# Altium PCB Sallen.PcbDoc
Units mm, origin at the board's own origin, x right, y up, seen from the top; angles counter-clockwise.
Board outline 100.27 x 50.25 mm, 2 copper layers (Top Layer, Bottom Layer); 68 components, 15 nets, 136 pads, 14 vias.
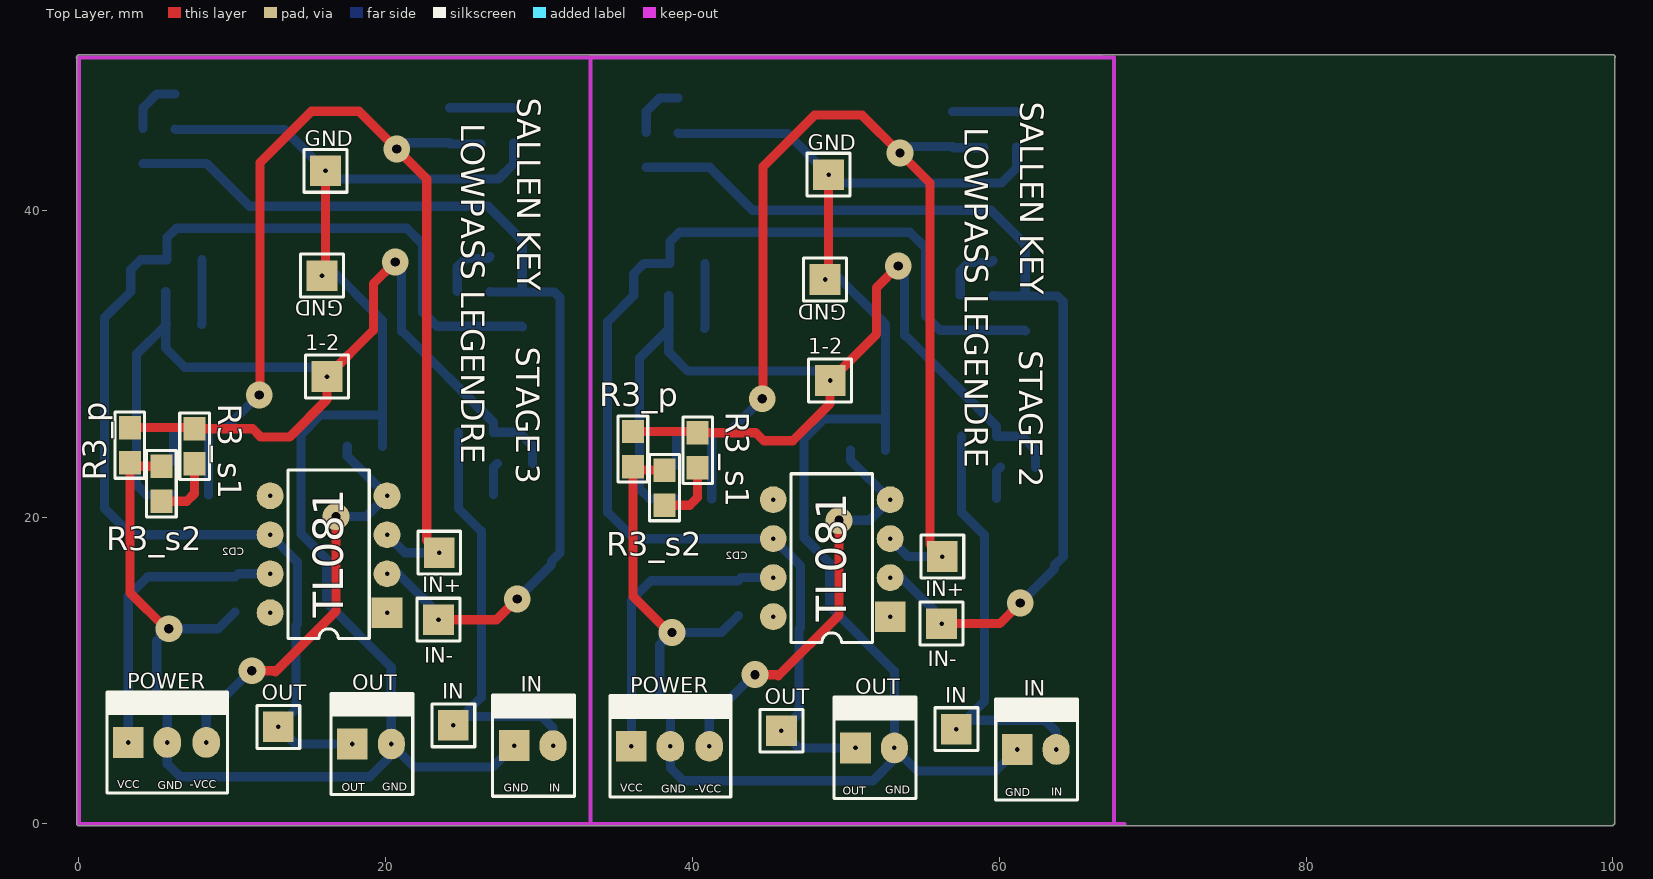
[diagram p0: Top Layer view]
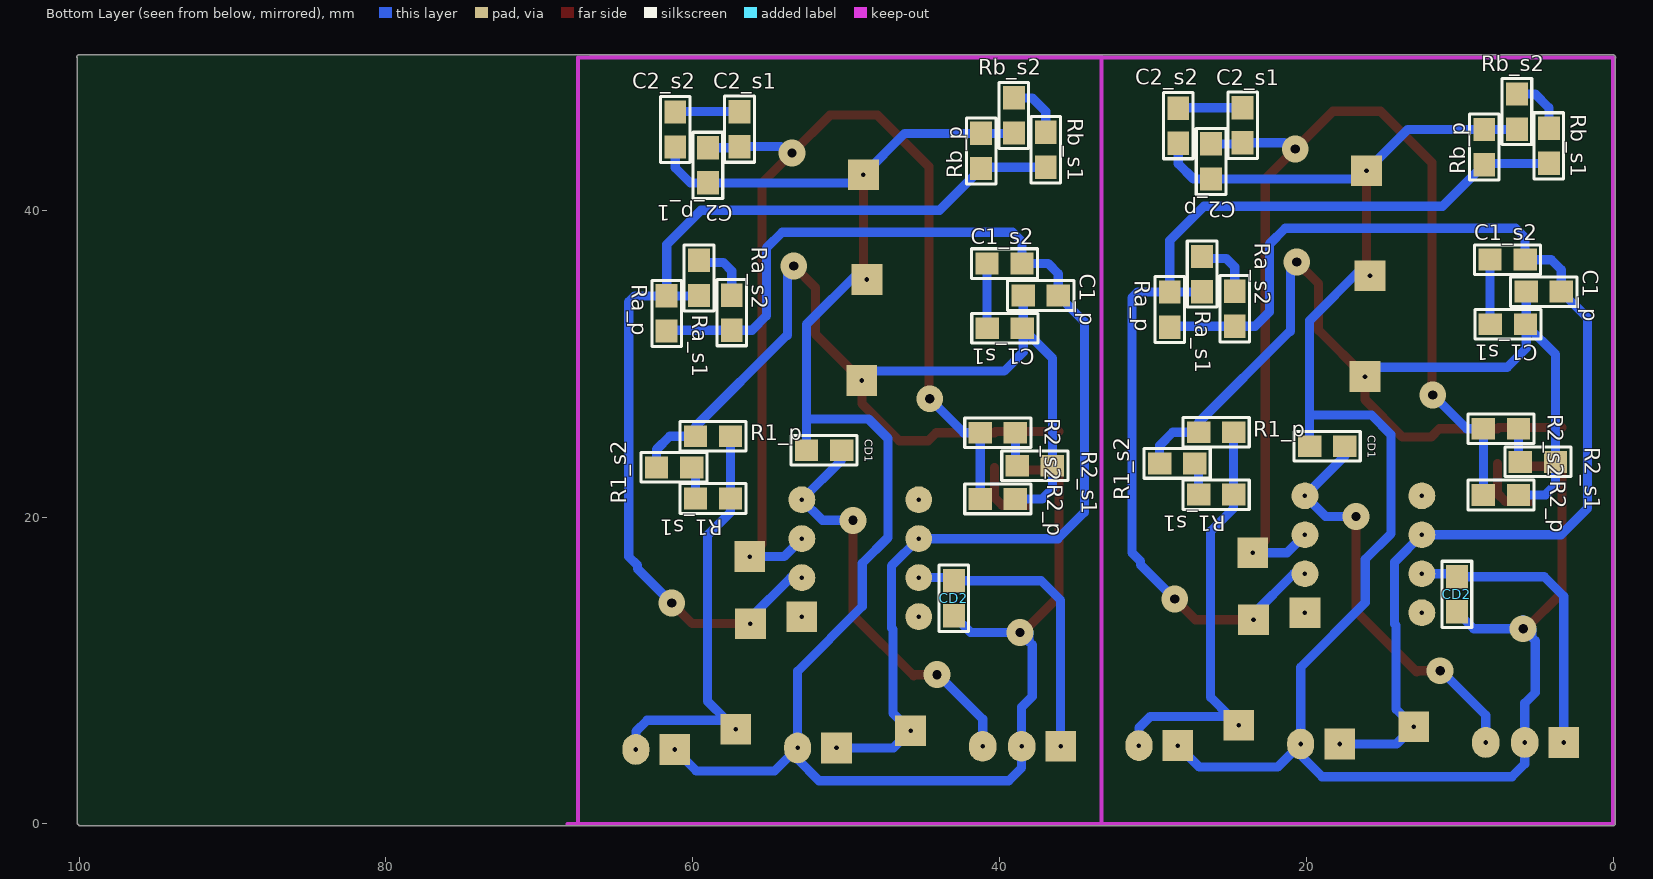
[diagram p1: Bottom Layer view, seen from below]

## Layer stack, top to bottom
Top Solder: solder mask 0.0102, Solder Resist, Dk 3.5
Top Layer: signal copper 0.0356
Dielectric 1: dielectric 0.32, FR-4, Dk 4.8
Bottom Layer: signal copper 0.0356
Bottom Solder: solder mask 0.0102, Solder Resist, Dk 3.5

## Board outline
-0.127,0 -0.127,49.911 cw(c0,49.911) -0.119,49.956 -0.119,49.955 cw(c0,50) 0,50.127 100.012,50.127 cw(c100.012,50) 100.14,50 cw(c100.012,50) 100.127,49.945 100.127,0.076 cw(c100,0.076) 100.044,-0.044 cw(c99.924,0) 99.924,-0.127 0,-0.127 cw(c0,0)

## Design rules (kind name [scope] priority, off if disabled: settings)
Clearance [All] p1: gap=0.6 ignorepadtopadclearanceinfootprint=FALSE
PolygonConnect [All] p1: connectstyle=Relief reliefconductorwidth=0.254 reliefentries=4 polygonreliefangle="90 Angle" airgapwidth=0.254
RoutingVias [All] p1: holewidth=0.7 width=2.5 viastyle="Through Hole" minholewidth=0.7 minwidth=2.5 maxholewidth=0.7 maxwidth=2.5
SolderMaskExpansion [All] p1: expansion=0.102
Width [All] p1: maxlimit=0.6 minlimit=0.6 preferedwidth=0.6
30 further rules are at their usual default settings.

## Classes and differential pairs
component class Sallen: POWER1

## Components (designator, comment, footprint, x,y, rotation, side; value= is the part's Value field where it differs from the comment)
1-2 "1-2" TPTH 16.18,29.159 r0 top (schematic designator TP9)
1-2 "1-2" TPTH 48.971,28.905 r0 top (schematic designator TP9)
C1_p "CAP" 0805 4.521,34.696 r180 bottom
C1_p "CAP" 0805 37.313,34.442 r180 bottom
C1_s1 "CAP" 0805 6.858,32.563 r0 bottom
C1_s1 "CAP" 0805 39.649,32.309 r0 bottom
C1_s2 "CAP" 0805 6.883,36.779 r180 bottom
C1_s2 "CAP" 0805 39.675,36.525 r180 bottom
C2_p "CAP" 0805 26.213,43.18 r270 bottom
C2_p_1 "CAP" 0805 59.004,42.926 r270 bottom (schematic designator C2_p)
C2_s1 "CAP" 0805 24.155,45.542 r90 bottom
C2_s1 "CAP" 0805 56.947,45.288 r90 bottom
C2_s2 "CAP" 0805 28.346,45.517 r270 bottom
C2_s2 "CAP" 0805 61.138,45.263 r270 bottom
CD1 "CAP" 0805 18.644,24.613 r0 bottom
CD1 "CAP" 0805 51.435,24.359 r0 bottom
CD2 "CAP" 0805 10.185,14.961 r270 bottom
CD2 "CAP" 0805 42.977,14.707 r270 bottom
GND "TP" TPTH 15.85,35.738 r90 top (schematic designator TP3)
GND "TP" TPTH 16.078,42.57 r90 top (schematic designator TP2)
GND "TP" TPTH 48.87,42.316 r90 top (schematic designator TP2)
GND "TP" TPTH 48.641,35.484 r90 top (schematic designator TP3)
IN "IN" TPTH 24.409,6.426 r0 top (schematic designator TP4)
IN "IN" MOLEX2 28.372,5.105 r0 top (schematic designator J3)
IN "IN" MOLEX2 61.163,4.851 r0 top (schematic designator J3)
IN "IN" TPTH 57.201,6.172 r0 top (schematic designator TP4)
IN+ "IN+" TPTH 23.495,17.678 r0 top (schematic designator TP7)
IN+ "IN+" TPTH 56.286,17.424 r0 top (schematic designator TP7)
IN- "IN-" TPTH 23.444,13.31 r0 top (schematic designator TP6)
IN- "IN-" TPTH 56.236,13.056 r0 top (schematic designator TP6)
OUT "OUT" TPTH 13.005,6.325 r0 top (schematic designator TP5)
OUT "OUT" MOLEX2 17.831,5.207 r0 top (schematic designator J4)
OUT "OUT" MOLEX2 50.622,4.953 r0 top (schematic designator J4)
OUT "OUT" TPTH 45.796,6.071 r0 top (schematic designator TP5)
POWER "SUPPLY" MOLEX3 3.226,5.309 r0 top (schematic designator J2)
POWER "SUPPLY" MOLEX3 36.017,5.055 r0 top (schematic designator J2)
R1_p "270" 0805 25.883,25.527 r180 bottom
R1_p "270" 0805 58.674,25.273 r180 bottom
R1_s1 "270" 0805 25.883,21.463 r180 bottom
R1_s1 "270" 0805 58.674,21.209 r180 bottom
R1_s2 "270" 0805 28.423,23.495 r0 bottom
R1_s2 "270" 0805 61.214,23.241 r0 bottom
R2_p "270" 0805 7.315,21.438 r180 bottom
R2_p "270" 0805 40.107,21.184 r180 bottom
R2_s1 "270" 0805 4.902,23.597 r180 bottom
R2_s1 "270" 0805 37.694,23.343 r180 bottom
R2_s2 "270" 0805 7.315,25.756 r0 bottom
R2_s2 "270" 0805 40.107,25.502 r0 bottom
R3_p "270" 0805 3.327,24.689 r90 top
R3_p "270" 0805 36.119,24.435 r90 top
R3_s1 "270" 0805 7.544,24.613 r90 top
R3_s1 "270" 0805 40.335,24.359 r90 top
R3_s2 "270" 0805 5.385,22.174 r270 top
R3_s2 "270" 0805 38.176,21.92 r270 top
Ra_p "270" 0805 28.905,33.528 r90 bottom
Ra_p "270" 0805 61.697,33.274 r90 bottom
Ra_s1 "270" 0805 26.797,35.839 r270 bottom
Ra_s1 "270" 0805 59.588,35.585 r270 bottom
Ra_s2 "270" 0805 24.663,33.579 r270 bottom
Ra_s2 "270" 0805 57.455,33.325 r270 bottom
Rb_p "270" 0805 8.407,44.12 r270 bottom
Rb_p "270" 0805 41.199,43.866 r270 bottom
Rb_s1 "270" 0805 4.191,44.196 r270 bottom
Rb_s1 "270" 0805 36.982,43.942 r270 bottom
Rb_s2 "270" 0805 6.274,46.431 r90 bottom
Rb_s2 "270" 0805 39.065,46.177 r90 bottom
TL081 "TL081" P008 16.281,17.577 r90 top (schematic designator U1)
TL081 "TL081" P008 49.073,17.323 r90 top (schematic designator U1)

## Footprints (in the part's own frame and the unit in brackets; to place one, negate y for a bottom-side part, rotate by r counter-clockwise, add the part's x,y. Pads: shape width x height; smd on the part's side, far side on the other; paste and mask are expansions set on the pad)
0805 [mil] "Pasivo 0805"
  rect 60x56 smd: 1(-45,0) 2(45,0)
  silkscreen extent -85,-38 85,38, body extent -40,-24 39,25, height 15
MOLEX2 [mm]
  rect 2x2 hole 0.3: 1(0,0)
  oval 1.75x2 hole 0.3: 2(2.54,0)
  silkscreen extent -1.4,-3.3 3.94,3.3, body extent -1.27,-3.17 3.81,3.17, height 10.74
MOLEX3 [mm] "Bornera con Tornillos 5mm separación"
  rect 2x2 hole 0.3: 1(0,0)
  oval 1.8x2 hole 0.3: 2(2.54,0) 3(5.08,0)
  silkscreen extent -1.4,-3.3 6.48,3.3, body extent -1.27,-3.17 6.35,3.17, height 10.74
P008 [mm] "DIP; 8 Leads; Row Spacing 7.62 mm; Pitch 2.54 mm"
  rect 2x2 hole 0.3: 1(-3.81,-3.81)
  round 1.75 hole 0.3: 2(-1.27,-3.81) 3(1.27,-3.81) 4(3.81,-3.81) 5(3.81,3.81) 6(1.27,3.81) 7(-1.27,3.81) 8(-3.81,3.81)
  silkscreen extent -5.5,-2.65 5.5,2.65
TPTH [mm]
  rect 2x2 hole 0.3: 1(0,0)
  silkscreen extent -1.4,-1.4 1.4,1.4, body extent -1.27,-1.27 1.27,1.27, height 6.04

## Part data
1-2 1-2 IN IN IN+ IN+ IN- IN- OUT OUT: library part TP
IN IN OUT OUT: library part MOLEX2
POWER POWER: library part MOLEX3
R1_p R1_p R1_s1 R1_s1 R1_s2 R1_s2 R2_p R2_p R2_s1 R2_s1 R2_s2 R2_s2 R3_p R3_p R3_s1 R3_s1 R3_s2 R3_s2 Ra_p Ra_p Ra_s1 Ra_s1 Ra_s2 Ra_s2 Rb_p Rb_p Rb_s1 Rb_s1 Rb_s2 Rb_s2: library part RES
TL081 TL081: library part TL081P, "JFET-Input Operational Amplifier", Code_JEDEC=MO-001-AN, ComponentLink1Description="Manufacturer Link", ComponentLink1URL=http://www.ti.com/, ComponentLink2Description=Datasheet, ComponentLink2URL=http://www-s.ti.com/sc/ds/tl081.pdf, DatasheetVersion=Feb-1999, LatestRevisionDate=04-Mar-2005, LatestRevisionNote="Stylized 3D Model Added.", Note="Pin 8 is not connected", PackageDescription="DIP; 8 Leads; Row Spacing 7.62 mm; Pitch 2.54 mm", PackageReference=P008, PackageVersion=Jun-1999, Published=16-Jan-2001, Publisher="Altium Limited"

## Via types
v1: diameter 1.75, hole 0.6, Top Layer to Bottom Layer, 14 vias

## Nets (pads, with @x,y where several pads share a name; then routed paths per layer and width w, separated by ;. In a path a pad name is that pad's centre, name@x,y a point inside that pad or via, vN(x,y) a via of type N, cw(c..) or ccw(c..) an arc to the next point about the centre after c; other vN are vias at no path point)
-VCC: CD1.1@17.501,24.613 POWER.3@8.306,5.309 TL081.4@20.091,21.387 | length 27.5
  Top Layer w0.6: v1(11.278,9.982) 12.725,9.982 12.802,9.906 16.764,13.868 v1(16.764,20.041)
  Bottom Layer w0.6: POWER.3@8.306,5.309 8.306,7.087 11.201,9.982 v1(11.278,9.982) ; v1(16.764,20.041) 18.745,20.041 20.091,21.387 17.501,23.978 CD1.1@17.501,24.613
GND: C2_p.2 C2_s2.2@28.346,44.374 CD1.2@19.787,24.613 CD2.2@10.185,13.818 GND.1@15.85,35.738 GND.1@16.078,42.57 IN.1@28.372,5.105 OUT.2@20.371,5.207 POWER.2@5.766,5.309 R3_p.1@3.327,23.546 R3_s2.1@5.385,23.317 Rb_p.1@8.407,45.263 Rb_s2.1@6.274,45.288 | length 128.3
  Top Layer w0.6: R3_s2.1@5.385,23.317 3.556,23.317 3.327,23.546 3.327,15.088 5.69,12.725 v1(5.867,12.725) ; GND.1@16.078,36.525 GND.1@16.078,42.57
  Bottom Layer w0.6: Rb_s2.1@6.274,45.288 6.299,45.263 8.407,45.263 13.386,45.263 16.078,42.57 16.612,42.037 C2_p.2 27.356,42.037 28.346,43.028 C2_s2.2@28.346,44.374 ; CD2.2@10.185,13.818 9.093,12.725 v1(5.867,12.725) ; GND.1@16.358,36.246 19.787,32.817 19.787,26.645 ; CD1.2@19.787,24.613 19.787,26.645 ; IN.1@28.372,5.105 26.975,3.708 21.869,3.708 OUT.2@20.371,5.207 ; v1@5.283,12.725 5.867,13.31 v1(5.867,12.725) ; v1@5.283,12.725 5.283,12.141 5.08,11.938 5.08,8.56 5.766,7.874 5.766,5.309 5.766,3.912 6.604,3.073 18.97,3.073 20.371,4.474 OUT.2@20.371,5.207 ; v1@5.283,12.725 v1(5.867,12.725) ; 19.787,26.645 15.748,26.645 14.478,25.375 14.478,18.923 16.154,17.247 16.154,14.431 20.371,10.215 OUT.2@20.371,5.207
NetC1_p_1: 1-2.1@16.18,29.159 C1_p.1@5.664,34.696 C1_s1.1@5.715,32.563 R1_p.1@27.026,25.527 R1_s2.2@29.566,23.495 R2_p.2@6.172,21.438 R2_s1.2@3.759,23.597 R3_p.2@3.327,25.832 R3_s1.2@7.544,25.756 | length 71.7
  Top Layer w0.6: R3_p.2@3.327,25.832 7.468,25.832 7.544,25.756 11.328,25.756 11.862,25.222 13.741,25.222 16.18,27.661 16.18,29.159 19.202,32.182 19.202,35.204 v1(20.625,36.627)
  Bottom Layer w0.6: C1_p.1@5.664,34.696 C1_s1.1@5.664,32.512 ; C1_s1.1@5.715,32.563 C1_s1.1@5.664,32.512 ; R2_p.2@6.172,21.438 4.42,21.438 3.759,22.098 3.759,23.597 3.759,30.607 C1_s1.1@5.664,32.512 ; 1-2.1@16.18,29.159 15.57,29.769 6.909,29.769 5.664,31.013 C1_s1.1@5.664,32.512 ; v1(20.625,36.627) 21.031,36.22 21.031,32.106 21.082,32.106 27.026,26.162 27.026,25.527 28.702,25.527 29.566,24.663 R1_s2.2@29.566,23.495
NetC1_p_2: C1_p.2@3.378,34.696 C1_s2.2@5.74,36.779 OUT.1@13.005,6.325 OUT.1@17.831,5.207 Ra_p.1@28.905,32.385 Ra_s2.2@24.663,32.436 TL081.6@12.471,18.847 | length 79.7
  Bottom Layer w0.6: OUT.1@17.729,5.105 17.831,5.207 14.122,5.207 13.005,6.325 14.148,7.468 14.148,12.933 14.246,13.032 14.246,17.072 12.471,18.847 3.404,18.847 1.676,20.574 1.676,32.995 3.378,34.696 3.378,36.119 4.039,36.779 5.74,36.779 5.74,38.202 6.363,38.824 21.374,38.824 22.403,37.795 22.403,33.376 23.343,32.436 24.663,32.436 28.854,32.436 Ra_p.1@28.905,32.385
NetC1_s1_2: C1_s1.2@8.001,32.563 C1_s2.1@8.026,36.779 | length 4.2
  Bottom Layer w0.6: C1_s1.2@8.001,32.563 8.026,32.588 C1_s2.1@8.026,36.779
NetC2_p_1: C2_p.1 C2_s1.1@24.155,44.399 IN+.1@23.495,17.678 R2_p.1@8.458,21.438 R2_s2.2@8.458,25.756 TL081.3@20.091,18.847 | length 71.5
  Top Layer w0.6: v1@11.811,28.143 11.811,43.104 15.164,46.457 18.263,46.457 v1(20.726,43.993) 22.682,42.037 22.682,18.491 IN+.1@23.495,17.678
  Bottom Layer w0.6: R2_p.1@8.458,21.438 8.458,25.756 9.55,25.756 v1(11.76,27.965) ; TL081.3@20.091,18.847 21.26,17.678 IN+.1@23.495,17.678 ; v1@21.107,44.044 21.463,44.399 24.155,44.399 24.232,44.323 C2_p.1
NetC2_s1_2: C2_s1.2@24.155,46.685 C2_s2.1@28.346,46.66 | length 4.2
  Bottom Layer w0.6: C2_s1.2@24.155,46.685 28.321,46.685 C2_s2.1@28.346,46.66
NetJ3_2: IN.1@24.409,6.426 IN.2@30.912,5.105 R1_p.2@24.74,25.527 R1_s1.2@24.74,21.463 | length 27.9
  Bottom Layer w0.6: IN.1@24.409,6.426 IN.1@24.989,7.005 ; R1_p.2@24.74,25.527 24.74,21.463 24.74,20.574 26.238,19.075 26.238,8.255 IN.1@24.989,7.005 ; IN.2@30.912,5.105 30.912,6.274 30.18,7.005 IN.1@24.989,7.005
NetR1_s1_1: R1_s1.1@27.026,21.463 R1_s2.1@27.28,23.495 | length 2.1
  Bottom Layer w0.6: R1_s1.1@27.026,21.463 27.026,23.241 R1_s2.1@27.28,23.495
NetR2_s1_1: R2_s1.1@6.045,23.597 R2_s2.1@6.172,25.756 | length 2.2
  Bottom Layer w0.6: R2_s1.1@6.045,23.597 6.172,23.724 R2_s2.1@6.172,25.756
NetR3_s1_1: R3_s1.1@7.544,23.47 R3_s2.2@5.385,21.031 | length 4.3
  Top Layer w0.6: R3_s2.2@5.385,21.031 7.036,21.031 7.544,21.539 R3_s1.1@7.544,23.47
NetRa_p_2: IN-.1@23.444,13.31 Ra_p.2@28.905,34.671 Ra_s1.2@26.797,34.696 Rb_p.2@8.407,42.977 Rb_s1.2@4.191,43.053 TL081.2@20.091,16.307 | length 66.2
  Top Layer w0.6: IN-.1@23.444,13.31 27.229,13.31 v1(28.575,14.656)
  Bottom Layer w0.6: Rb_s1.2@4.191,43.053 8.331,43.053 8.407,42.977 11.125,40.259 26.67,40.259 28.905,38.024 Ra_p.2@28.905,34.671 ; TL081.2@20.091,16.307 20.824,16.307 23.444,13.687 IN-.1@23.444,13.31 ; Ra_s1.2@26.797,34.696 26.822,34.671 Ra_p.2@28.905,34.671 ; v1(28.575,14.656) 30.81,16.891 30.81,17.12 31.369,17.678 31.369,34.29 30.988,34.671 Ra_p.2@28.905,34.671
NetRa_s1_1: Ra_s1.1@26.797,36.982 Ra_s2.1@24.663,34.722 | length 4
  Bottom Layer w0.6: Ra_s2.1@24.663,34.722 24.663,36.297 25.222,36.855 26.67,36.855 Ra_s1.1@26.797,36.982
NetRb_s1_1: Rb_s1.1@4.191,45.339 Rb_s2.2@6.274,47.574 | length 3.8
  Bottom Layer w0.6: Rb_s1.1@4.191,45.339 4.191,46.685 5.08,47.574 Rb_s2.2@6.274,47.574
VCC: CD2.1@10.185,16.104 POWER.1@3.226,5.309 TL081.7@12.471,16.307 | length 19.4
  Bottom Layer w0.6: POWER.1@3.226,5.309 3.226,14.834 4.496,16.104 10.185,16.104 10.389,16.307 TL081.7@12.471,16.307
pads on no net: 1-2.1@48.971,28.905 C1_p.1@38.456,34.442 C1_p.2@36.17,34.442 C1_s1.1@38.506,32.309 C1_s1.2@40.792,32.309 C1_s2.1@40.818,36.525 C1_s2.2@38.532,36.525 C2_p_1.1 C2_p_1.2 C2_s1.1@56.947,44.145 C2_s1.2@56.947,46.431 C2_s2.1@61.138,46.406 C2_s2.2@61.138,44.12 CD1.1@50.292,24.359 CD1.2@52.578,24.359 CD2.1@42.977,15.85 CD2.2@42.977,13.564 GND.1@48.87,42.316 GND.1@48.641,35.484 IN+.1@56.286,17.424 IN-.1@56.236,13.056 IN.1@57.201,6.172 IN.1@61.163,4.851 IN.2@63.703,4.851 OUT.1@45.796,6.071 OUT.1@50.622,4.953 OUT.2@53.162,4.953 POWER.1@36.017,5.055 POWER.2@38.557,5.055 POWER.3@41.097,5.055 R1_p.1@59.817,25.273 R1_p.2@57.531,25.273 R1_s1.1@59.817,21.209 R1_s1.2@57.531,21.209 R1_s2.1@60.071,23.241 R1_s2.2@62.357,23.241 R2_p.1@41.25,21.184 R2_p.2@38.964,21.184 R2_s1.1@38.837,23.343 R2_s1.2@36.551,23.343 R2_s2.1@38.964,25.502 R2_s2.2@41.25,25.502 R3_p.1@36.119,23.292 R3_p.2@36.119,25.578 R3_s1.1@40.335,23.216 R3_s1.2@40.335,25.502 R3_s2.1@38.176,23.063 R3_s2.2@38.176,20.777 Ra_p.1@61.697,32.131 Ra_p.2@61.697,34.417 Ra_s1.1@59.588,36.728 Ra_s1.2@59.588,34.442 Ra_s2.1@57.455,34.468 Ra_s2.2@57.455,32.182 Rb_p.1@41.199,45.009 Rb_p.2@41.199,42.723 Rb_s1.1@36.982,45.085 Rb_s1.2@36.982,42.799 Rb_s2.1@39.065,45.034 Rb_s2.2@39.065,47.32 TL081.1 TL081.2@52.883,16.053 TL081.3@52.883,18.593 TL081.4@52.883,21.133 TL081.5 TL081.6@45.263,18.593 TL081.7@45.263,16.053 TL081.8
copper on no net: | length 516.9
  Top Layer w0.6: 36.119,25.578 40.259,25.578 40.335,25.502 44.12,25.502 44.653,24.968 46.533,24.968 48.971,27.407 48.971,28.905 51.994,31.928 51.994,34.95 v1(53.416,36.373) ; 38.176,20.777 39.827,20.777 40.335,21.285 40.335,23.216 ; 38.176,23.063 36.347,23.063 36.119,23.292 36.119,14.834 38.481,12.471 v1(38.659,12.471) ; v1(44.069,9.728) 45.517,9.728 45.593,9.652 49.555,13.614 v1(49.555,19.787) ; v1@44.602,27.889 44.602,42.85 47.955,46.203 51.054,46.203 v1(53.518,43.739) 55.474,41.783 55.474,18.237 56.286,17.424 ; 48.87,36.271 48.87,42.316 ; 56.236,13.056 60.02,13.056 v1(61.366,14.402)
  Bottom Layer w0.6: 36.017,5.055 36.017,14.58 37.287,15.85 42.977,15.85 43.18,16.053 45.263,16.053 ; 36.982,42.799 41.123,42.799 41.199,42.723 43.917,40.005 59.461,40.005 61.697,37.77 61.697,34.417 ; 36.982,45.085 36.982,46.431 37.871,47.32 39.065,47.32 ; 38.456,34.442 38.456,32.258 ; 38.506,32.309 38.456,32.258 ; 38.837,23.343 38.964,23.47 38.964,25.502 ; 38.964,21.184 37.211,21.184 36.551,21.844 36.551,23.343 36.551,30.353 38.456,32.258 ; 39.065,45.034 39.091,45.009 41.199,45.009 46.177,45.009 48.87,42.316 49.403,41.783 59.004,41.783 60.147,41.783 61.138,42.774 61.138,44.12 ; 40.792,32.309 40.818,32.334 40.818,36.525 ; 41.097,5.055 41.097,6.833 43.993,9.728 v1(44.069,9.728) ; 41.25,21.184 41.25,25.502 42.342,25.502 v1(44.552,27.711) ; 42.977,13.564 41.885,12.471 v1(38.659,12.471) ; 48.971,28.905 48.362,29.515 39.7,29.515 38.456,30.759 38.456,32.258 ; 49.149,35.992 52.578,32.563 52.578,26.391 ; v1(49.555,19.787) 51.537,19.787 52.883,21.133 50.292,23.724 50.292,24.359 ; 50.521,4.851 50.622,4.953 46.914,4.953 45.796,6.071 46.939,7.214 46.939,12.679 47.038,12.778 47.038,16.818 45.263,18.593 36.195,18.593 34.468,20.32 34.468,32.741 36.17,34.442 36.17,35.865 36.83,36.525 38.532,36.525 38.532,37.948 39.154,38.57 54.165,38.57 55.194,37.541 55.194,33.122 56.134,32.182 57.455,32.182 61.646,32.182 61.697,32.131 ; 52.578,24.359 52.578,26.391 ; 52.883,16.053 53.616,16.053 56.236,13.433 56.236,13.056 ; 52.883,18.593 54.051,17.424 56.286,17.424 ; v1(53.416,36.373) 53.823,35.966 53.823,31.852 53.873,31.852 59.817,25.908 59.817,25.273 61.493,25.273 62.357,24.409 62.357,23.241 ; v1@53.899,43.79 54.254,44.145 56.947,44.145 57.023,44.069 59.004,44.069 ; 56.947,46.431 61.112,46.431 61.138,46.406 ; 57.201,6.172 57.78,6.751 ; 57.455,34.468 57.455,36.043 58.014,36.601 59.461,36.601 59.588,36.728 ; 57.531,25.273 57.531,21.209 57.531,20.32 59.03,18.821 59.03,8.001 57.78,6.751 ; 59.588,34.442 59.614,34.417 61.697,34.417 ; 59.817,21.209 59.817,22.987 60.071,23.241 ; 61.163,4.851 59.766,3.454 54.661,3.454 53.162,4.953 ; v1(61.366,14.402) 63.602,16.637 63.602,16.866 64.16,17.424 64.16,34.036 63.779,34.417 61.697,34.417 ; 63.703,4.851 63.703,6.02 62.972,6.751 57.78,6.751 ; v1@38.075,12.471 38.659,13.056 v1(38.659,12.471) ; v1@38.075,12.471 38.075,11.887 37.871,11.684 37.871,8.306 38.557,7.62 38.557,5.055 38.557,3.658 39.395,2.819 51.761,2.819 53.162,4.22 53.162,4.953 ; v1@38.075,12.471 v1(38.659,12.471) ; 52.578,26.391 48.539,26.391 47.269,25.121 47.269,18.669 48.946,16.993 48.946,14.177 53.162,9.961 53.162,4.953

## Keep-outs
Keep-Out Layer:
  lines w0.254: 33.33,0 33.355,-0.025 ; 33.33,50 66.66,50 ; 33.355,49.975 33.355,-0.025 ; 68.174,0 0,0 0,49.886 -0.076,49.962 67.488,49.962 67.488,-0.025 33.355,-0.025

## Silkscreen, mask and mechanical layers (free items; w line width, h text height)
Top Overlay:
  text "SALLEN KEY" at 28.575,47.32 h1.52 r270
  text "SALLEN KEY" at 61.366,47.066 h1.52 r270
  text "LOWPASS LEGENDRE" at 24.943,45.669 h1.52 r270
  text "LOWPASS LEGENDRE" at 57.734,45.415 h1.52 r270
  text "STAGE 3" at 28.499,31.115 h1.52 r270
  text "STAGE 2" at 61.29,30.861 h1.52 r270
  text "VCC" at 2.489,2.337 h0.52
  text "-VCC" at 7.239,2.311 h0.52
  text "GND" at 5.156,2.261 h0.52
  text "GND" at 19.787,2.159 h0.52
  text "OUT" at 17.145,2.134 h0.52
  text "GND" at 27.686,2.083 h0.52
  text "IN" at 30.658,2.083 h0.52
  text "VCC" at 35.306,2.083 h0.52
  text "GND" at 37.948,2.032 h0.52
  text "-VCC" at 40.157,2.032 h0.52
  text "GND" at 52.553,1.981 h0.52
  text "OUT" at 49.809,1.905 h0.52
  text "IN" at 63.373,1.829 h0.52
  text "GND" at 60.401,1.803 h0.52
Drill Guide:
  lines w0.254: 68.326,0.025 68.326,49.987 ; 0,0 0,49.924 0.038,49.962 99.962,49.962 100,50 100,0 0,0